# Altium PCB Ethernet_Module.PcbDoc (part 1 of 2)
Units mm, origin at the board's own origin, x right, y up, seen from the top; angles counter-clockwise.
Board outline 42 x 21.99 mm, 4 copper layers (Top Layer, Int1 (GND), Int2 (PWR), Bottom Layer), stack 0.77 mm thick; 39 components, 59 nets, 215 pads, 61 vias.
Unrouted connection lines stored in the file: 3.
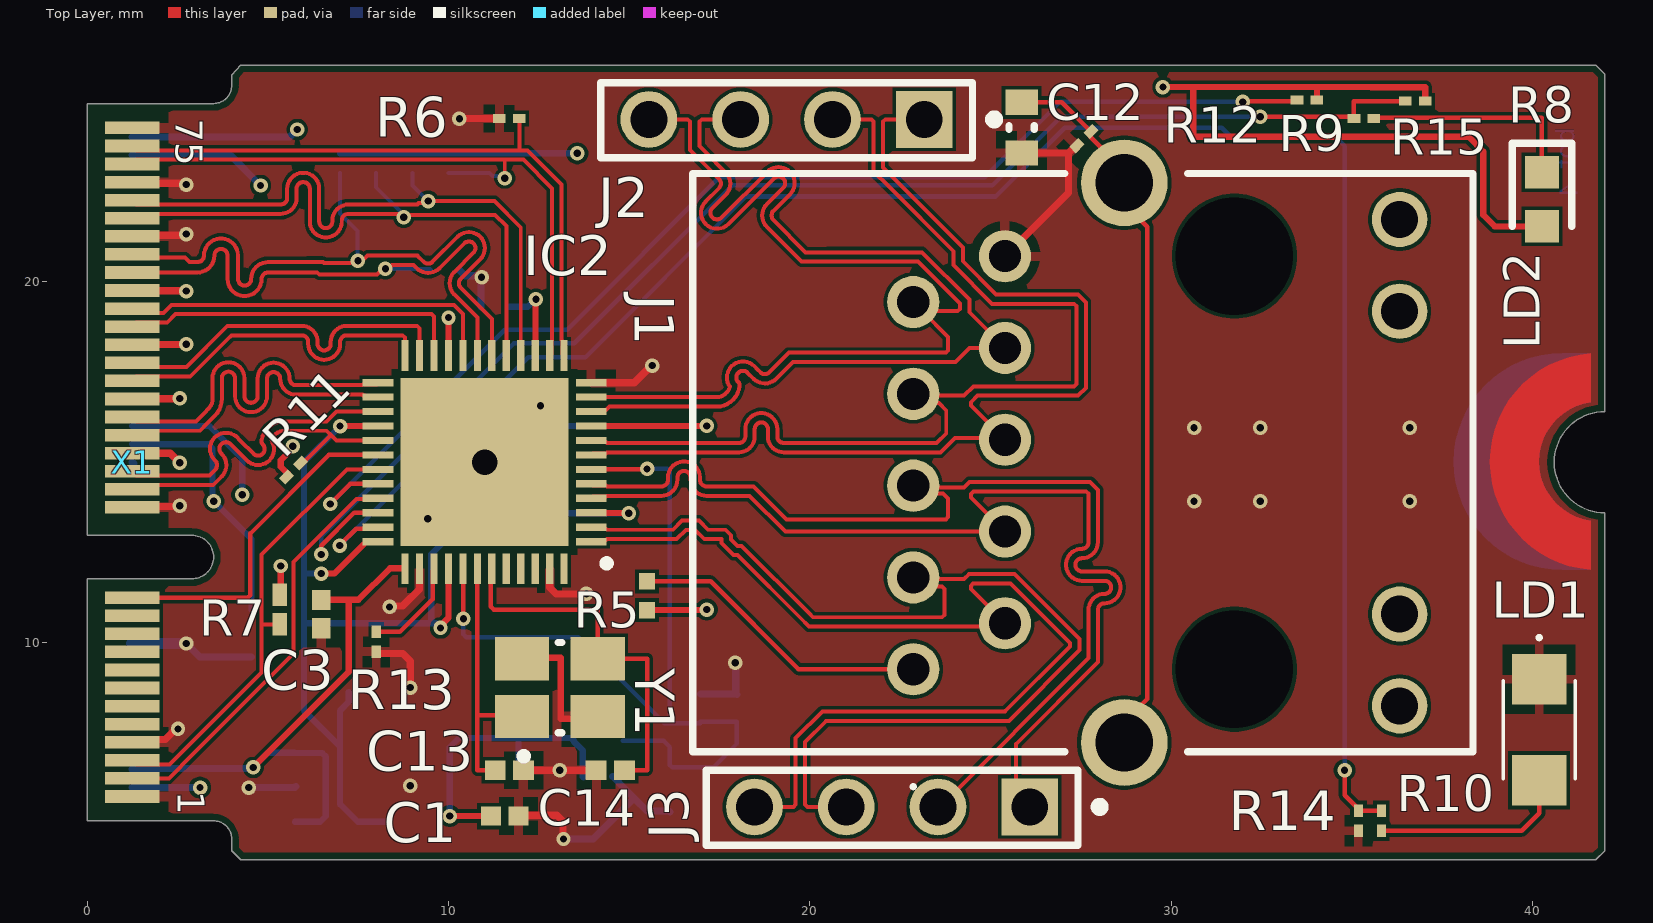
[diagram p0: Top Layer view]
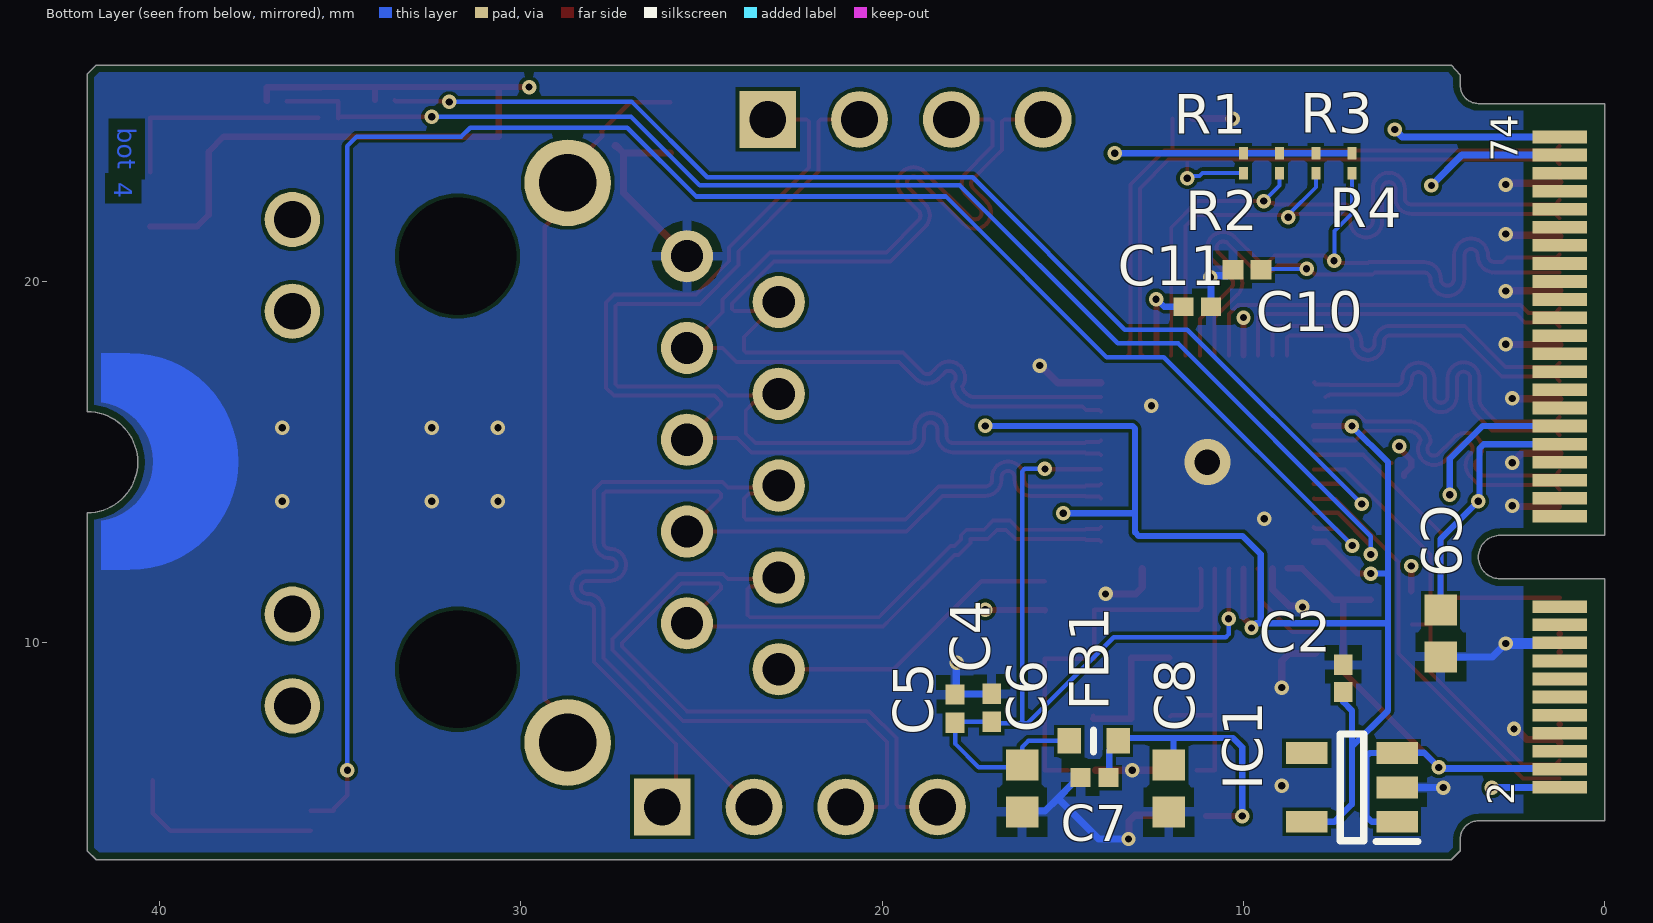
[diagram p1: Bottom Layer view, seen from below]
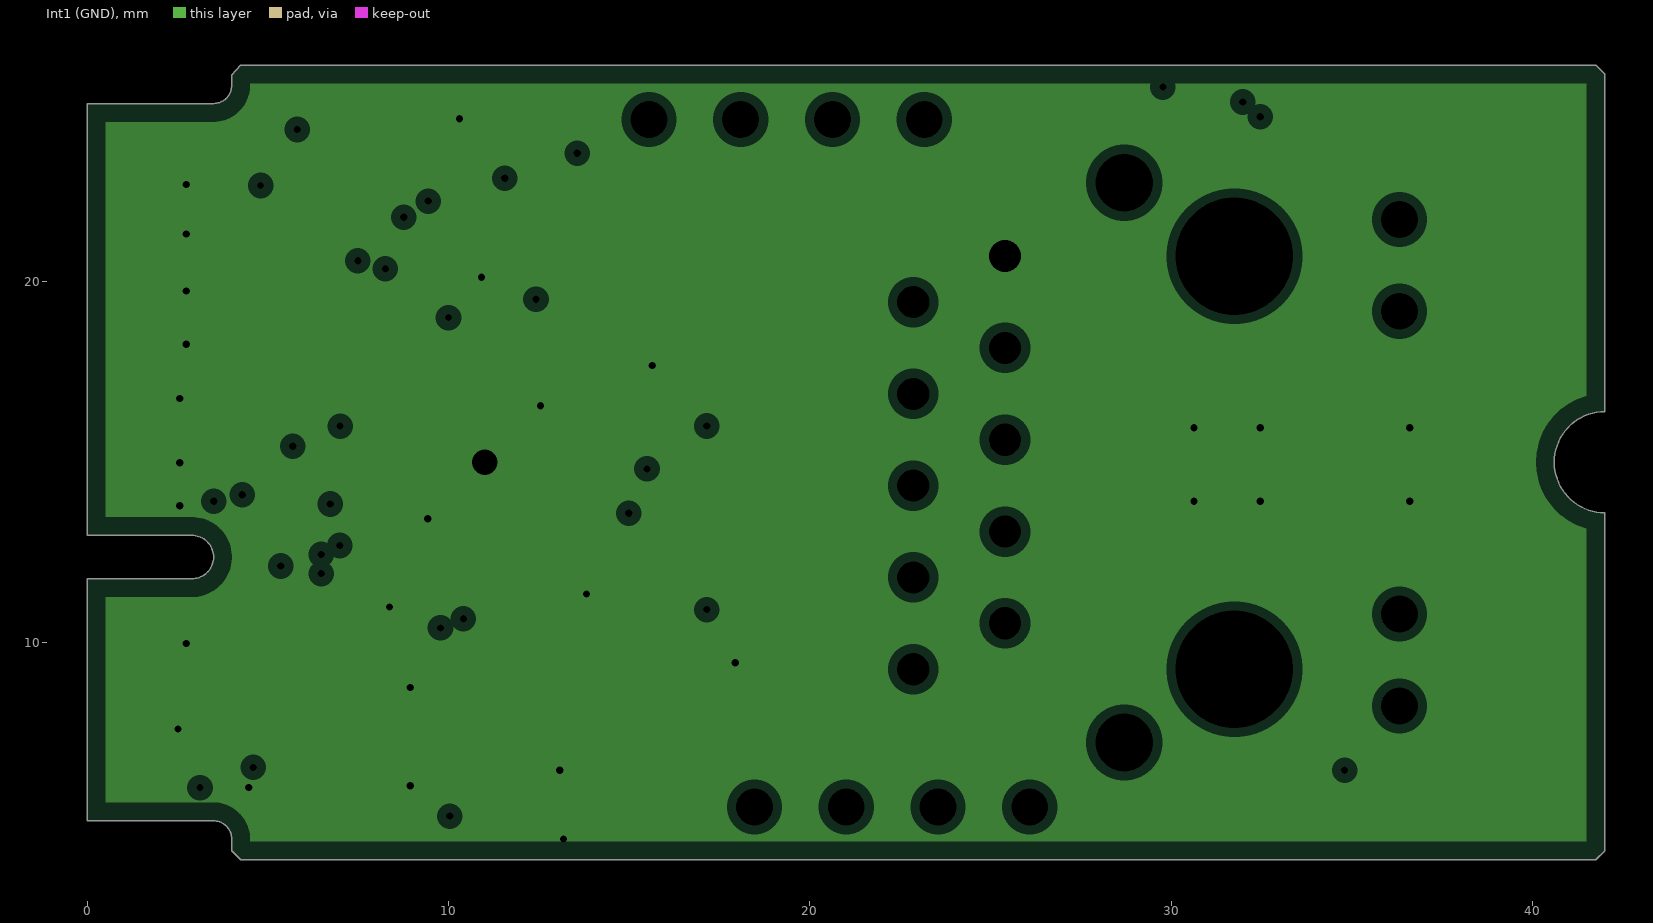
[diagram p2: Int1 (GND), clearances drawn from the general rule]
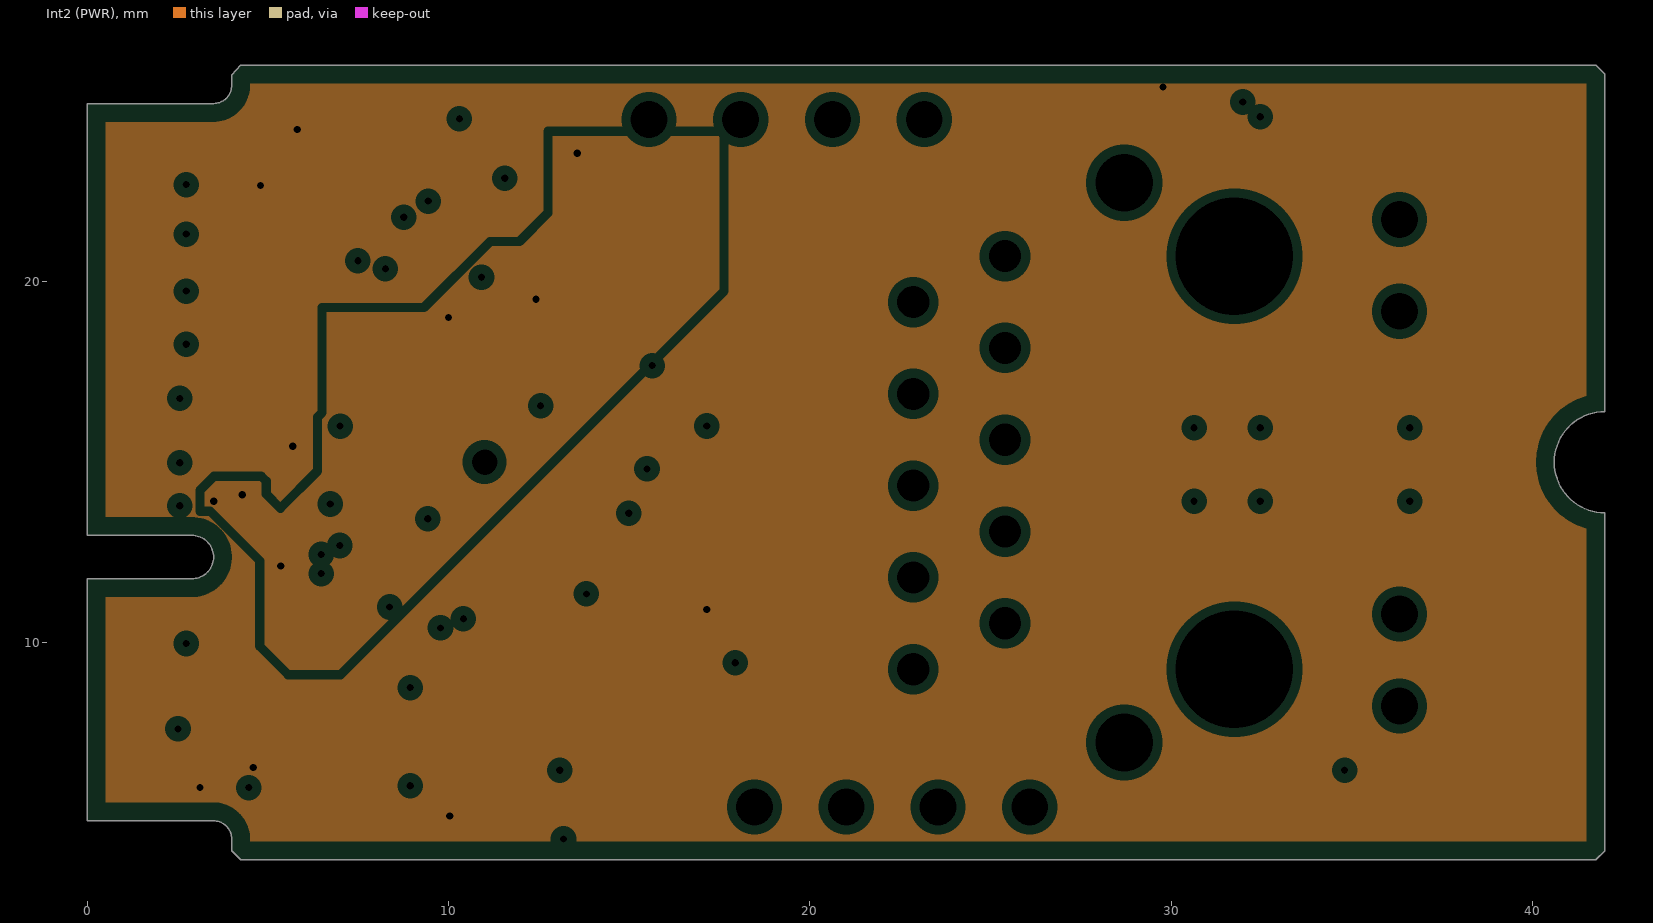
[diagram p3: Int2 (PWR), clearances drawn from the general rule]

## Layer stack, top to bottom
Top Solder: solder mask 0.0254, SM-001, Dk 4
Top Layer: signal copper 0.035
Dielectric 1: prepreg 0.1118, PP-015, Dk 4.3
Int1 (GND): plane copper 0.035, net GND
Dielectric 3: core 0.4064, Core-034, Dk 4.6
Int2 (PWR): plane copper 0.035, net (Multiple Nets)
Dielectric 5: prepreg 0.1118, PP-015, Dk 4.3
Bottom Layer: signal copper 0.035
Bottom Solder: solder mask 0.0254, SM-001, Dk 4

## Board outline
4,4.25 4,4.575 ccw(c3.5,4.575) 3.5,5.075 0,5.075 0,11.775 2.9,11.775 ccw(c2.9,12.375) 3.5,12.375 ccw(c2.9,12.375) 2.9,12.975 0,12.975 0,24.925 3.5,24.925 ccw(c3.5,25.425) 4,25.425 4,25.713 4.25,25.988 41.75,25.988 42,25.738 42,16.4 ccw(c42,15) 40.6,15 ccw(c42,15) 42,13.6 42,4.25 41.75,4 4.25,4

## Design rules (kind name [scope] priority, off if disabled: settings)
BoardOutlineClearance [All] p1: gap=0.2 ignorepadtopadclearanceinfootprint=FALSE
Clearance [All] p1: gap=0.1 ignorepadtopadclearanceinfootprint=FALSE
DiffPairsRouting DiffPair_DP_100RDiffPairsRouting [InDifferentialPairClass('DP_100R')] p1: maxlimit=0.15 minlimit=0.15 mostfreqgap=0.15 toplayer_minwidth=0.11 toplayer_maxwidth=0.11 toplayer_prefwidth=0.11 bottomlayer_minwidth=0.11 bottomlayer_maxwidth=0.11 bottomlayer_prefwidth=0.11 impedanceprofiledriven=TRUE impedanceprofileid={D0ED966C-66EA-42B8-8657-787F2A77329B} impedanceprofilevalue=100.000000 maxuncoupledlength=12.7
DiffPairsRouting DiffPair_DP_100RDiffPairsRouting_1 [InDifferentialPairClass('DP_100R')] p2: maxlimit=0.254 minlimit=0.254 mostfreqgap=0.254 toplayer_minwidth=0.381 toplayer_maxwidth=0.381 toplayer_prefwidth=0.381 bottomlayer_minwidth=0.381 bottomlayer_maxwidth=0.381 bottomlayer_prefwidth=0.381 maxuncoupledlength=12.7
DiffPairsRouting DiffPairsRouting_100R [InDifferentialPairClass('DP_100R')] p3: maxlimit=0.15 minlimit=0.15 mostfreqgap=0.15 toplayer_minwidth=0.11 toplayer_maxwidth=0.11 toplayer_prefwidth=0.11 bottomlayer_minwidth=0.11 bottomlayer_maxwidth=0.11 bottomlayer_prefwidth=0.11 impedanceprofiledriven=TRUE impedanceprofileid={D0ED966C-66EA-42B8-8657-787F2A77329B} impedanceprofilevalue=100.000000 maxuncoupledlength=12.7
DiffPairsRouting [All] p4: maxlimit=0.254 minlimit=0.254 mostfreqgap=0.254 toplayer_minwidth=0.381 toplayer_maxwidth=0.381 toplayer_prefwidth=0.381 bottomlayer_minwidth=0.381 bottomlayer_maxwidth=0.381 bottomlayer_prefwidth=0.381 maxuncoupledlength=12.7
HoleSize [All] p1: absolutevalues=TRUE maxlimit=3.25 minlimit=0.025 maxpercent=80.000 minpercent=20.000
MatchedLengths DiffPair_DP_100RMatchedLengths [InDifferentialPairClass('DP_100R')] p1: tolerance=25.4 checknetsindiffpair=FALSE checkdiffpairvsdiffpair=TRUE checkxsignals=TRUE checkothers=TRUE
MatchedLengths DiffPair_DP_100RMatchedLengths_1 [InDifferentialPairClass('DP_100R')] p2: tolerance=25.4 checknetsindiffpair=FALSE checkdiffpairvsdiffpair=TRUE checkxsignals=TRUE checkothers=TRUE
MatchedLengths MatchedLengths_1 [InNetClass('S_GP2')] p3: tolerance=1 checknetsindiffpair=TRUE checkdiffpairvsdiffpair=FALSE checkxsignals=FALSE checkothers=FALSE
MatchedLengths [InNetClass('S_GP')] p4: tolerance=1 checknetsindiffpair=TRUE checkdiffpairvsdiffpair=FALSE checkxsignals=FALSE checkothers=FALSE
PlaneClearance [All] p1: clearance=0.254
PlaneConnect [All] p1: pad.planeconnectstyle=Relief pad.reliefexpansion=0.508 pad.reliefentries=4 pad.reliefconductorwidth=0.254 pad.reliefairgap=0.254 via.planeconnectstyle=Direct via.reliefexpansion=0.508 via.reliefentries=4 via.reliefconductorwidth=0.254 via.reliefairgap=0.254
PolygonConnect [All] p1: thpad.connectstyle=Relief thpad.reliefconductorwidth=0.254 thpad.reliefentries=4 thpad.polygonreliefangle="90 Angle" thpad.airgapwidth=0.254 smdpad.connectstyle=Relief smdpad.reliefconductorwidth=0.254 smdpad.reliefentries=4 smdpad.polygonreliefangle="90 Angle" smdpad.airgapwidth=0.254 via.connectstyle=Direct via.reliefconductorwidth=0.254 via.reliefentries=4 via.polygonreliefangle="90 Angle" via.airgapwidth=0.254
RoutingVias [All] p1: holewidth=0.2 width=0.4 viastyle="Through Hole" minholewidth=0.2 minwidth=0.4 maxholewidth=3 maxwidth=6
SolderMaskExpansion [All] p1: expansion=0.102 istentingtop=FALSE
Width Width_50R [InNetClass('SE_50R')] p1: maxlimit=0.172 minlimit=0.172 preferedwidth=0.172 impedanceprofiledriven=TRUE impedanceprofileid={CEA07893-88F1-4413-85C8-7467995CDE0A} impedanceprofilevalue=50.000000 minimp=50.000000 maximp=50.000000 favimp=50.000000
Width [All] p2: maxlimit=4 minlimit=0.1 preferedwidth=0.125
26 further rules are at their usual default settings.

## Classes and differential pairs
differential pair class DP_100R: FMC_GP_D0 FMC_GP_D1 FMC_GP_D2 FMC_GP_D3 FMC_GP_D4 FMC_GP_D5 FMC_GP_D6 FMC_GP_D7 MDI_0 MDI_1 MDI_2 MDI_3
net class SE_50R: FMC_GP_S0 FMC_GP_S1 FMC_GP_S2 FMC_GP_S3 FMC_GP_S4 FMC_GP_S5 FMC_GP_S6
net class S_GP: FMC_GP_S0 FMC_GP_S1 FMC_GP_S2 FMC_GP_S3 FMC_GP_S4 FMC_GP_S5 FMC_GP_S6
net class FMC_GP_S[0..7]: FMC_GP_S0 FMC_GP_S1 FMC_GP_S2 FMC_GP_S3 FMC_GP_S4 FMC_GP_S5 FMC_GP_S6 FMC_GP_S7
net class FMC_GP_D_P[0..7]: FMC_GP_D_P0 FMC_GP_D_P1 FMC_GP_D_P2 FMC_GP_D_P3 FMC_GP_D_P4 FMC_GP_D_P5 FMC_GP_D_P6 FMC_GP_D_P7
net class FMC_GP_D_N[0..7]: FMC_GP_D_N0 FMC_GP_D_N1 FMC_GP_D_N2 FMC_GP_D_N3 FMC_GP_D_N4 FMC_GP_D_N5 FMC_GP_D_N6 FMC_GP_D_N7
net class DP_GP: FMC_GP_D_N0 FMC_GP_D_N1 FMC_GP_D_N2 FMC_GP_D_N3 FMC_GP_D_N4 FMC_GP_D_N5 FMC_GP_D_N6 FMC_GP_D_N7 FMC_GP_D_P0 FMC_GP_D_P1 FMC_GP_D_P2 FMC_GP_D_P3 FMC_GP_D_P4 FMC_GP_D_P5 FMC_GP_D_P6 FMC_GP_D_P7 MDI_0_N MDI_0_P MDI_1_N MDI_1_P MDI_2_N MDI_2_P MDI_3_N MDI_3_P
component class connector: X1
differential pair MDI_3: +MDI_3_P -MDI_3_N
differential pair MDI_2: +MDI_2_P -MDI_2_N
differential pair MDI_1: +MDI_1_P -MDI_1_N
differential pair MDI_0: +MDI_0_P -MDI_0_N
differential pair FMC_GP_D0: +FMC_GP_D_P0 -FMC_GP_D_N0
differential pair FMC_GP_D7: +FMC_GP_D_P7 -FMC_GP_D_N7
differential pair FMC_GP_D6: +FMC_GP_D_P6 -FMC_GP_D_N6
differential pair FMC_GP_D5: +FMC_GP_D_P5 -FMC_GP_D_N5
differential pair FMC_GP_D4: +FMC_GP_D_P4 -FMC_GP_D_N4
differential pair FMC_GP_D3: +FMC_GP_D_P3 -FMC_GP_D_N3
differential pair FMC_GP_D2: +FMC_GP_D_P2 -FMC_GP_D_N2
differential pair FMC_GP_D1: +FMC_GP_D_P1 -FMC_GP_D_N1

## Components (designator, comment, footprint, x,y, rotation, side; value= is the part's Value field where it differs from the comment)
C1 "1uF" CAPC1005X60X30LL05T10 11.557,5.207 r180 top
C2 "1uF" CAPC1005X60X30LL05T10 7.239,9.017 r270 bottom
C3 "100nF" CAPC1050X55X23LL05T13 6.477,10.795 r90 top
C4 "100nF" CAPC1050X55X23LL05T13 16.967,8.204 r270 bottom
C5 "100nF" CAPC1050X55X23LL05T13 17.983,8.179 r270 bottom
C6 "10uF" CAPC1608X90X35LL15T15 16.129,5.969 r90 bottom
C7 "100nF" CAPC1050X55X23LL05T13 14.122,6.274 r180 bottom
C8 "10uF" CAPC1608X90X35LL15T15 12.065,5.969 r90 bottom
C9 "10uF" CAPC1608X90X35LL15T15 4.547,10.262 r90 bottom
C10 "1uF" CAPC1005X60X30LL05T10 11.278,19.304 r0 bottom
C11 "27pF" CAPC1005X56X25LL10T15 9.906,20.32 r180 bottom
C12 "1nF" CAPC0603(1608)100_L 25.857,24.257 r90 top
C13 "27pF" CAPC1005X56X25LL10T15 11.684,6.477 r180 top
C14 "27pF" CAPC1005X56X25LL10T15 14.478,6.477 r0 top
FB1 "BLM18KG601SN1B" BLM18EG121SH1D 14.148,7.29 r0 bottom
IC1 "LD39015M10R" SOT95P280X145-5N 7,6 r0 bottom
IC2 "RTL8211E-VL-CG" QFN40P600X600X100-49N 11,15 r180 top
J1 "HFJV1-E1G16-L12RL" HFJV1E1G16L12RL 22.86,9.271 r90 top
J2 "HTSW-104-07-G-S" FP-HTSW-104-07-G-S-MFG 19.355,24.486 r180 top
J3 "HTSW-104-07-G-S" FP-HTSW-104-07-G-S-MFG 22.276,5.461 r180 top
LD1 "AA3021LSYSK_J3-TR" AA3021LSYSKJ3TR 40.183,7.595 r270 top
LD2 "CSL1901VW1" LEDC1608X65N 40.259,22.276 r270 top
R1 "4.7kR" RESC0603X28X15LL05T05 10,23.275 r90 bottom
R2 "4.7kR" RESC0603X28X15LL05T05 9,23.275 r90 bottom
R3 "4.7kR" RESC0603X28X15LL05T05 8,23.275 r90 bottom
R4 "4.7kR" RESC0603X28X15LL05T05 7,23.275 r90 bottom
R5 "0R" RESC1005X40X25LL05T05 15.494,11.303 r270 top
R6 "4.7kR" RESC0603X28X15LL05T05 11.684,24.511 r0 top
R7 "1.5kR" RESC0603X28N 5.334,10.922 r270 top
R8 "4.7kR" RESC0603X28X15LL05T05 36.754,24.994 r0 top
R9 "4.7kR" RESC0603X28X15LL05T05 33.757,25.019 r0 top
R10 "75R" RESC0603X28X15LL05T05 35.814,5.08 r270 top
R11 "4.7kR" RESC0603X28X15LL05T05 5.715,14.783 r225 top
R12 "1MegR" RESC0603X28X15LL05T05 27.584,23.952 r45 top
R13 "2.49kR" RESC0603X28X15LL05T05 8.001,10.033 r90 top
R14 "4.7kR" RESC0603X28X15LL05T05 35.179,5.08 r90 top
R15 "750R" RESC0603X28X15LL05T05 35.331,24.511 r180 top
X1 "CONN PWR CARD EDGE PCB SLOT MALE" CON-67_0.5MM_PCB_SLOT 1.25,15 r270 top
Y1 "FL2500213Z" FL2500213Z 13.081,8.763 r0 top

## Footprints (in the part's own frame and the unit in brackets; to place one, negate y for a bottom-side part, rotate by r counter-clockwise, add the part's x,y. Pads: shape width x height; smd on the part's side, far side on the other; paste and mask are expansions set on the pad)
AA3021LSYSKJ3TR [mm]
  rect 1.4x1.5 smd: 1(-1.4,0) 2(1.4,0)
  silkscreen extent -2.6,-1 1.35,1, body extent -1.35,-1 1.35,1, height 1.4
BLM18EG121SH1D [mm]
  rect 0.65x0.7 smd: 1(-0.675,0) 2(0.675,0)
  silkscreen extent 0,-0.3 0,0.3, body extent -0.8,-0.4 0.8,0.4, height 0.8
CAPC0603(1608)100_L [mm] "Chip Capacitor, Body 1.6x0.8mm, Height 1.0mm, IPC High Density"
  rect 0.7x0.9 smd: 1(-0.7,0) 2(0.7,0)
  silkscreen extent -0.05,-0.35 0.05,0.35, body extent -0.87,-0.47 0.88,0.48, height 1
CAPC1005X56X25LL10T15 [mm] "Chip Capacitor, 2-Leads, Body 1.00x0.50mm, IPC High Density"
  rect 0.58x0.54 smd: 1(-0.39,0) 2(0.39,0)
  body extent -0.55,-0.3 0.55,0.3, height 0.56
CAPC1005X60X30LL05T10 [mm] "Chip Capacitor, 2-Leads, Body 1.00x0.50mm, IPC High Density"
  rect 0.56x0.52 smd: 1(-0.38,0) 2(0.38,0)
  body extent -0.53,-0.28 0.53,0.28, height 0.6
CAPC1050X55X23LL05T13 [mm] "Chip Capacitor, 2-Leads, Body 1.05x0.55mm, IPC High Density"
  rect 0.56x0.52 smd: 1(-0.39,0) 2(0.39,0)
  body extent -0.53,-0.28 0.53,0.28, height 0.55
CAPC1608X90X35LL15T15 [mm] "Chip Capacitor, 2-Leads, Body 1.60x0.81mm, IPC High Density"
  rect 0.85x0.9 smd: 1(-0.65,0) 2(0.65,0)
  body extent -0.88,-0.48 0.87,0.48, height 0.9
CON-67_0.5MM_PCB_SLOT [mm] "Connector 67, 0.5mm pitch - No BOM"
  rect 0.35x1.5 smd: 1(9.25,0) 3(8.75,0) 5(8.25,0) 7(7.75,0) 9(7.25,0) 11(6.75,0) 13(6.25,0) 15(5.75,0) 17(5.25,0) 19(4.75,0) 21(4.25,0) 23(3.75,0) 33(1.25,0) 35(0.75,0) 37(0.25,0) 39(-0.25,0) 41(-0.75,0) 43(-1.25,0) 45(-1.75,0) 47(-2.25,0) 49(-2.75,0) 51(-3.25,0) 53(-3.75,0) 55(-4.25,0) 57(-4.75,0) 59(-5.25,0) 61(-5.75,0) 63(-6.25,0) 65(-6.75,0) 67(-7.25,0) 69(-7.75,0) 71(-8.25,0) 73(-8.75,0) 75(-9.25,0)
  rect 0.35x1.5 smd far side: 2(9,0) 4(8.5,0) 6(8,0) 8(7.5,0) 10(7,0) 12(6.5,0) 14(6,0) 16(5.5,0) 18(5,0) 20(4.5,0) 22(4,0) 32(1.5,0) 34(1,0) 36(0.5,0) 38(0,0) 40(-0.5,0) 42(-1,0) 44(-1.5,0) 46(-2,0) 48(-2.5,0) 50(-3,0) 52(-3.5,0) 54(-4,0) 56(-4.5,0) 58(-5,0) 60(-5.5,0) 62(-6,0) 64(-6.5,0) 66(-7,0) 68(-7.5,0) 70(-8,0) 72(-8.5,0) 74(-9,0)
FL2500213Z [mm]
  rect 1.5x1.2 smd: 1(-1.05,-0.8) 2(1.05,-0.8) 3(1.05,0.8) 4(-1.05,0.8)
  silkscreen extent -1.1,-2 0.05,1.25, body extent -1.68,-1.28 1.68,1.28, height 0.88
FP-HTSW-104-07-G-S-MFG [mm]
  rect 1.57x1.57 hole 1.02 paste-1000 mask+0: 1(-3.81,0)
  round 1.57 hole 1.02 paste-1000 mask+0: 2(-1.27,0) 3(1.27,0) 4(3.81,0)
  silkscreen extent -5.87,-1.02 5.14,1.06, body extent -5.24,-1.37 5.24,1.37, height 0.25
HFJV1E1G16L12RL [mm]
  round 2.4 hole 1.6: MH1(-2.03,-5.84) MH2(13.46,-5.84)
  round 1.625 hole 3.25 unplated: MH3(0,-8.89) MH4(11.43,-8.89)
  round 1.446 hole 0.89: P1(0,0) P2(1.27,-2.54) P3(2.54,0) P4(3.81,-2.54) P5(5.08,0) P6(6.35,-2.54) P7(7.62,0) P8(8.89,-2.54) P9(10.16,0) P10(11.43,-2.54)
  round 1.53 hole 1.02: P11(-1.015,-13.46) P12(1.525,-13.46) P13(9.905,-13.46) P14(12.445,-13.46)
  silkscreen extent -3.3,-15.49 13.71,6.1, body extent -2.73,-15.49 14.16,6.1, height 16.61
LEDC1608X65N [mm]
  rect 0.9x0.95 smd: 1(-0.75,0) 2(0.75,0)
  silkscreen extent -1.55,-0.82 0.75,0.82, body extent -0.8,-0.4 0.8,0.4, height 0.55
QFN40P600X600X100-49N [mm]
  rect 0.85x0.2 smd: 1(-2.95,2.2) 2(-2.95,1.8) 3(-2.95,1.4) 4(-2.95,1) 5(-2.95,0.6) 6(-2.95,0.2) 7(-2.95,-0.2) 8(-2.95,-0.6) 9(-2.95,-1) 10(-2.95,-1.4) 11(-2.95,-1.8) 12(-2.95,-2.2) 25(2.95,-2.2) 26(2.95,-1.8) 27(2.95,-1.4) 28(2.95,-1) 29(2.95,-0.6) 30(2.95,-0.2) 31(2.95,0.2) 32(2.95,0.6) 33(2.95,1) 34(2.95,1.4) 35(2.95,1.8) 36(2.95,2.2)
  rect 0.2x0.85 smd: 13(-2.2,-2.95) 14(-1.8,-2.95) 15(-1.4,-2.95) 16(-1,-2.95) 17(-0.6,-2.95) 18(-0.2,-2.95) 19(0.2,-2.95) 20(0.6,-2.95) 21(1,-2.95) 22(1.4,-2.95) 23(1.8,-2.95) 24(2.2,-2.95) 37(2.2,2.95) 38(1.8,2.95) 39(1.4,2.95) 40(1,2.95) 41(0.6,2.95) 42(0.2,2.95) 43(-0.2,2.95) 44(-0.6,2.95) 45(-1,2.95) 46(-1.4,2.95) 47(-1.8,2.95) 48(-2.2,2.95)
  rect 4.65x4.65 smd: 49(0,0)
  silkscreen extent -3.47,2.7 -3.28,2.9, body extent -3.05,-3.05 3.05,3.05, height 1
RESC0603X28N [mm]
  rect 0.625x0.4 smd: 1(-0.412,0) 2(0.412,0)
  body extent -0.3,-0.15 0.3,0.15, height 0.28
RESC0603X28X15LL05T05 [mm] "Chip Resistor, 2-Leads, Body 0.60x0.30mm, IPC High Density"
  rect 0.35x0.25 smd: 1(-0.275,0) 2(0.275,0)
  body extent -0.33,-0.17 0.32,0.18, height 0.28
RESC1005X40X25LL05T05 [mm] "Chip Resistor, 2-Leads, Body 1.05x0.55mm, IPC High Density"
  rect 0.45x0.45 smd: 1(-0.4,0) 2(0.4,0)
  body extent -0.53,-0.28 0.53,0.28, height 0.4
SOT95P280X145-5N [mm]
  rect 1.15x0.6 smd: 1(-1.25,0.95) 2(-1.25,0) 3(-1.25,-0.95) 4(1.25,-0.95) 5(1.25,0.95)
  silkscreen extent -1.83,-1.48 0.33,1.5, body extent -1.4,-1.48 1.4,1.48, height 1.45

## Part data
C1 C2 C10: library part CMP-2008-02044-1, Case Code (Imperial)=0402, Dielectric=X5R, Dielectric Material=Ceramic, Manufacturer=Kemet, Manufacturer Part Number=C0402C105K9PACTU, Max Operating Temperature=85°C, Min Operating Temperature=-55°C, Package Quantity=1, Supplier Part Number 1=399-4873-6-ND, Tolerance=10%, Voltage=6.3V, Case/Package=0402, Category="Ceramic Capacitors", ComponentLink1Description=https://datasheet.ciiva.com/28645/1789732-28645392.pdf?src-supplier=Element14, ComponentLink1URL=https://datasheet.ciiva.com/28645/1789732-28645392.pdf?src-supplier=Element14, ComponentLink2Description=https://datasheet.ciiva.com/11786/0900766b8116eb59-11786028.pdf?src-supplier=RSComponents, ComponentLink2URL=https://datasheet.ciiva.com/11786/0900766b8116eb59-11786028.pdf?src-supplier=RSComponents, ComponentLink3Description=https://datasheet.ciiva.com/7747/kem-c1006-x5r-smd-7747445.pdf?src-supplier=Element14, ComponentLink3URL=https://datasheet.ciiva.com/7747/kem-c1006-x5r-smd-7747445.pdf?src-supplier=Element14, ComponentLink4Description=https://datasheet.ciiva.com/7747/40889-7747623.pdf?src-supplier=Element14, ComponentLink4URL=https://datasheet.ciiva.com/7747/40889-7747623.pdf?src-supplier=Element14, ComponentLink5Description=https://datasheet.ciiva.com/18192/getdatasheetpartid-127800-18192427.pdf?src-supplier=Verical, ComponentLink5URL=https://datasheet.ciiva.com/18192/getdatasheetpartid-127800-18192427.pdf?src-supplier=Verical, Depth=0.5mm, Height=0.5mm, Lead Free="Lead Free", Lead Pitch=0.3mm, Length=1mm, Mount="Surface Mount", Number of Pins=2, Packaging="Tape and Reel", Part Number=C0402C105K9PACTU, Pricing 1="1=0.10000, 10=0.02600, 100=0.01180, 500=0.00844, 1000=0.00662, 2500=0.00602, 5000=0.00554 (USD)", Radiation Hardening=No, REACH SVHC="No SVHC", RoHS=Yes, Stock 1=1737568, Supplier 1=Digi-Key, Termination=SMD/SMT, Thickness=0.022inch, Voltage Rating=6.3V, Voltage Rating (DC)=6.3V, Width=0.02inch
C3 C4 C5 C7: library part CMP-2000-05439-1, "Chip Capacitor, 100 nF, +/- 10%, 16 V, -55 to 125 degC, 0402 (1005 Metric), RoHS, Tape and Reel", Case Code (Imperial)=0402, Case Code (Metric)=1005, Dielectric=X7R, Manufacturer="Samsung Electro-Mechanics", Manufacturer Part Number=CL05B104KO5NNNC, Max Operating Temperature=125°C, Min Operating Temperature=-55°C, Package Quantity=1, Rated Voltage=16V, Supplier Part Number 1=1276-1001-1-ND, Tolerance=10%, Tolerance (%)=±10%, Case Size/Dimension=0402, Case/Package=0402, Category="Ceramic Capacitors", ComponentLink1Description=https://datasheet.ciiva.com/26920/getdatasheetpartid-359683-26920169.pdf?src-supplier=Verical, ComponentLink1URL=https://datasheet.ciiva.com/26920/getdatasheetpartid-359683-26920169.pdf?src-supplier=Verical, ComponentLink2Description=https://datasheet.ciiva.com/29198/458718-da-01-en-vs-kondensator-0402-29198423.pdf?src-supplier=Conrad, ComponentLink2URL=https://datasheet.ciiva.com/29198/458718-da-01-en-vs-kondensator-0402-29198423.pdf?src-supplier=Conrad, ComponentLink3Description=https://datasheet.ciiva.com/16208/cl05b104kq5nnnc-16208343.pdf?src-supplier=Future+Electronics, ComponentLink3URL=https://datasheet.ciiva.com/16208/cl05b104kq5nnnc-16208343.pdf?src-supplier=Future+Electronics, ComponentLink4Description=https://datasheet.ciiva.com/26309/mlcc-catalogdownload2013-eng-26309003.pdf?src-supplier=Distrelec, ComponentLink4URL=https://datasheet.ciiva.com/26309/mlcc-catalogdownload2013-eng-26309003.pdf?src-supplier=Distrelec, Contact Plating=Tin, Datasheet URL=https://datasheet.ciiva.com/29198/458718-da-01-en-vs-kondensator-0402-29198423.pdf, Datasheet Version=Nov-10, Depth=0.5mm, Height=0.5mm, Lead Free="Lead Free", Length=1mm, Manufacturer URL=http://www.samsungsem.com/global/index.jsp, Material=Ceramic, Mount="Surface Mount", Packaging="Tape and Reel", Pricing 1="1=0.10000, 10=0.02800, 50=0.01520, 100=0.01240, 500=0.00886, 1000=0.00696, 2500=0.00632, 5000=0.00582 (USD)", Radiation Hardening=No, RoHS=Yes, Stock 1=18886859, Supplier 1=Digi-Key, Thickness=0.022inch, Voltage=16V, Voltage Rating=16V, Voltage Rating (DC)=16V, Width=0.02inch
C6 C8 C9: library part CMP-2006-04476-1, Case Code (Imperial)=0603, Case Code (Metric)=1608, Dielectric=X5R, Dielectric Material=Ceramic, Manufacturer="AVX Interconnect / Elco", Manufacturer Part Number=06036D106MAT2A, Max Operating Temperature=85°C, Min Operating Temperature=-55°C, Package Quantity=1, Supplier Part Number 1=478-5318-1-ND, Tolerance=20%, Voltage=6.3V, Case/Package=0603, Category="Ceramic Capacitors", ComponentLink1Description=https://datasheet.ciiva.com/153/cx5r-153301.pdf?src-supplier=Digi-Key, ComponentLink1URL=https://datasheet.ciiva.com/153/cx5r-153301.pdf?src-supplier=Digi-Key, ComponentLink2Description=https://datasheet.ciiva.com/1458/1796776-1458117.pdf?src-supplier=Element14, ComponentLink2URL=https://datasheet.ciiva.com/1458/1796776-1458117.pdf?src-supplier=Element14, ComponentLink3Description=https://datasheet.ciiva.com/153/cx5r-153302.pdf?src-supplier=Digi-Key, ComponentLink3URL=https://datasheet.ciiva.com/153/cx5r-153302.pdf?src-supplier=Digi-Key, ComponentLink4Description=https://datasheet.ciiva.com/153/cx5r-153303.pdf?src-supplier=Digi-Key, ComponentLink4URL=https://datasheet.ciiva.com/153/cx5r-153303.pdf?src-supplier=Digi-Key, ComponentLink5Description=https://datasheet.ciiva.com/5422/cx5r-33896-5422935.pdf?src-supplier=Mouser, ComponentLink5URL=https://datasheet.ciiva.com/5422/cx5r-33896-5422935.pdf?src-supplier=Mouser, ComponentLink6Description=https://datasheet.ciiva.com/16538/cx5r-16538025.pdf?src-supplier=Avnet+Asia, ComponentLink6URL=https://datasheet.ciiva.com/16538/cx5r-16538025.pdf?src-supplier=Avnet+Asia, ComponentLink7Description=https://datasheet.ciiva.com/2987/cx5r-2987866.pdf?src-supplier=Avnet, ComponentLink7URL=https://datasheet.ciiva.com/2987/cx5r-2987866.pdf?src-supplier=Avnet, ComponentLink8Description=https://datasheet.ciiva.com/14591/70001028-14591754.pdf?src-supplier=Allied+Electronics, ComponentLink8URL=https://datasheet.ciiva.com/14591/70001028-14591754.pdf?src-supplier=Allied+Electronics, ComponentLink9Description=https://datasheet.ciiva.com/2987/cx5r-2987867.pdf?src-supplier=Avnet, ComponentLink9URL=https://datasheet.ciiva.com/2987/cx5r-2987867.pdf?src-supplier=Avnet, ComponentLink10Description=https://datasheet.ciiva.com/16201/cx5r-16201627.pdf?src-supplier=Future+Electronics, ComponentLink10URL=https://datasheet.ciiva.com/16201/cx5r-16201627.pdf?src-supplier=Future+Electronics, Construction=Flat, Contact Plating=Tin,Matte, Depth=0.81mm, Height=0.9mm, Lead Free="Lead Free", Length=1.6mm, Mount="Surface Mount,PCB", Number of Pins=2, Packaging="Tape and Reel", Part Number=06036D106MAT2A, Pricing 1="1=0.24000, 10=0.16500, 50=0.09900, 100=0.08360, 500=0.05720, 1000=0.05060 (USD)", Radiation Hardening=No, REACH SVHC="No SVHC", RoHS=Yes, RoHS Compliant=Yes, Series=-, Stock 1=1934840, Supplier 1=Digi-Key, Termination=SMD/SMT, Thickness=0.035inch, Voltage Rating=6.3V, Voltage Rating (DC)=6.3V, Width=0.032inch
C11 C13 C14: library part CMP-2008-02772-1, "0402YA270JAT2A", Manufacturer="AVX Interconnect / Elco", Part Number=0402YA270JAT2A
C12: library part CMP-1035-01871-1, "CAP 1nF 10V ±1% 0603 (1608 Metric) Thickness 1mm SMD", Case-EIA=0603, Case-Metric=1608, Rated Voltage="10 V", Tolerance=Â±1%, Max Thickness="1 mm", Technology=SMT
FB1: "Ferrite Bead", Manufacturer_Name="Murata Electronics", Datasheet Link=http://www.murata.com/~/media/webrenewal/support/library/catalog/products/emc/emifil/c31e.ashx?la=en-gb, Height=0.95mm, Manufacturer_Part_Number=BLM18KG601SN1B
IC1: "Integrated Circuit", Manufacturer_Name=STMicroelectronics, Mouser Part Number=511-LD39015M10R, Arrow Part Number=LD39015M10R, Arrow Price/Stock=https://www.arrow.com/en/products/ld39015m10r/stmicroelectronics, Datasheet Link=http://www.st.com/web/en/resource/technical/document/datasheet/CD00173477.pdf, Height=1.45mm, Manufacturer_Part_Number=LD39015M10R, Mouser Price/Stock=https://www.mouser.co.uk/ProductDetail/STMicroelectronics/LD39015M10R?qs=wsLAKTqgg6iLO1LS4XmvbQ%3D%3D
IC2: "GbE PHY with RGMII interface & EEE feature, 1.8V & 1.5V", Manufacturer=Realtek, Supplier Part Number=758353-RTL8211E-VL-CG, Manufacturer Part Number=RTL8211E-VL-CG, Pricing="98=3,06900 (USD)", RoHS=Yes, RoHS Compliant=Yes, Stock=54900, Supplier="Win Source Electronics"
J1: "Connector", Manufacturer_Name="Halo Electronics", Mouser Part Number=493-HFJV1-E1G16L12RL, Datasheet Link=https://componentsearchengine.com/Datasheets/1/HFJV1-E1G16-L12RL.pdf, Height=16.51mm, Manufacturer_Part_Number=HFJV1-E1G16-L12RL, Mouser Price/Stock=https://www.mouser.co.uk/ProductDetail/HALO-Electronics/HFJV1-E1G16-L12RL?qs=cGEy3R83DS%2FPhGzGdiRY4A%3D%3D
J2 J3: library part CMP-02766-001776-1, "CONN HEADER VERT 4POS 2.54MM", Contact Material=Bronze, Contact Plating=Gold, Gender=Male, Mount="Through Hole", Number of Contacts=4, Number of Rows=1, Packaging=Bulk, Pitch=2.54mm, Radiation Hardening=No, Reach SVHC Compliant=Yes, RoHS Compliant=Yes, Series=HTSW, Termination="Through Hole"
LD1: "LED", Manufacturer_Name=Kingbright, Manufacturer_Part_Number=AA3021LSYSK/J3-TR, Mouser Part Number=604-AA3021LSYSK/J3TR, Datasheet Link=https://eagle.componentsearchengine.com/Datasheets/1/AA3021LSYSK_J3-TR.pdf, Height=1.3mm, Mouser Price/Stock=https://www.mouser.co.uk/ProductDetail/Kingbright/AA3021LSYSK-J3-TR?qs=Oo40KB9lBTmS1V8p5PSO3Q%3D%3D
LD2: "LED", Manufacturer_Name="ROHM Semiconductor", Mouser Part Number=755-CSL1901VW1, Datasheet Link=https://fscdn.rohm.com/en/products/databook/datasheet/opto/led/chip_mono/csl1901vw1-e.pdf, Height=0.65mm, Manufacturer_Part_Number=CSL1901VW1, Mouser Price/Stock=https://www.mouser.co.uk/ProductDetail/ROHM-Semiconductor/CSL1901VW1?qs=vvQtp7zwQdNmrXZcE27xEA%3D%3D
R1 R2 R3 R4 R6 R8 R9 R10 R11 R14 R15: library part CMP-2004-00671-1, "CRCW02014K70FKED", Manufacturer="Vishay Dale", Part Number=CRCW02014K70FKED
R5: library part CMP-2000-07451-1, "ERJ2GE0R00X Chip Resistor, 0 Ohm, 0.1 W, -55 to 155 degC, 0402 (1005 Metric), RoHS, Tape and Reel", Case Code (Imperial)=0402, Case Code (Metric)=1005, Manufacturer=Panasonic, Max Operating Temperature=155degC, Max Power Dissipation=100mW, Min Operating Temperature=-55degC, Package Description="2-Pin Surface Mount Device, Body 1 x 0.5 mm", Package Quantity=1, Package Reference=402, Resistance=0mOhm, Temperature Coefficient=600ppm/��C, Tolerance=5%, Voltage Rating=50V, Case/Package=0402, Composition=ThickFilm, Contact Plating=Tin, Datasheet URL=https://industrial.panasonic.com/cdbs/www-data/pdf/RDA0000/AOA0000C301.pdf, Datasheet Version=03/2015, Depth=0.5mm, Height=0.35mm, Lead Free=LeadFree, Length=1mm, Manufacturer URL=http://www.panasonic.com/, Military Standard=Not, Mount=SurfaceMount, Mounting Technology=SurfaceMount, Number of Terminations=2, Packaging=TapeandReel, Power Rating=100mW, Radiation Hardening=No, REACH SVHC=NoSVHC, RoHSCompliant=True, Termination=SMD/SMT, Voltage Rating (DC)=50V, Width=0.02inch
R7: library part CRCW02011K50FKED, "CRCW02011K50FKED", Manufacturer_Name=Vishay, Mouser Part Number=71-CRCW02011K50FKED, Arrow Part Number=CRCW02011K50FKED, Arrow Price/Stock=https://www.arrow.com/en/products/crcw02011k50fked/vishay, Datasheet Link=http://www.vishay.com/docs/20035/dcrcwe3.pdf, Height=0.28mm, Manufacturer_Part_Number=CRCW02011K50FKED, Mouser Price/Stock=https://www.mouser.com/Search/Refine.aspx?Keyword=71-CRCW02011K50FKED
R12: library part CMP-2004-00671-1, "CRCW02011M00FKED", Manufacturer="Vishay Dale", Part Number=CRCW02014K70FKED
R13: library part CMP-2004-00671-1, "CRCW02012K49FKED", Manufacturer="Vishay Dale", Part Number=CRCW02014K70FKED
X1: library part CMP-01224-1, "Mates with 2199119-4 - No BOM", Card Thickness=0.8mm, Card Type="Non Specified - Dual Edge", Gender=Male, Mates with=2199119-4, Number of Positions=67, Pitch=0.5mm
Y1: "Crystal or Oscillator", Manufacturer_Name="Diodes Inc.", Mouser Part Number=729-FL2500213Z, Arrow Part Number=FL2500213Z, Arrow Price/Stock=https://www.arrow.com/en/products/fl2500213z/diodes-incorporated?region=nac, Datasheet Link=https://www.diodes.com/assets/Datasheets/FL.pdf, Height=0.78mm, Manufacturer_Part_Number=FL2500213Z, Mouser Price/Stock=https://www.mouser.co.uk/ProductDetail/Diodes-Incorporated/FL2500213Z?qs=Rp3RbKSfAt0a9%2FPmeza8Xg%3D%3D

## Via types
v1: diameter 0.4, hole 0.2, Top Layer to Bottom Layer, 60 vias
v2: diameter 1.27, hole 0.711, Top Layer to Bottom Layer, 1 vias

## Nets (pads, with @x,y where several pads share a name; then routed paths per layer and width w, separated by ;. In a path a pad name is that pad's centre, name@x,y a point inside that pad or via, vN(x,y) a via of type N, cw(c..) or ccw(c..) an arc to the next point about the centre after c; other vN are vias at no path point)
1V0_5: C2.2 IC1.5 IC2.3 IC2.9 IC2.28 IC2.36 IC2.40 | length 42.3
  Top Layer w0.125: IC2.3 IC2.3@13.955,13.595 ; v1@14.98,13.595 v1(14.986,13.589)
  Top Layer w0.172: v1(6.477,11.916) 6.841,11.916 7.725,12.8 IC2.36 ; v1(7,16) IC2.28 ; v1(9.779,10.414) 9.779,10.476 10,10.697 IC2.40 ; IC2.9 13.951,16.001 v1(17.145,16.002) v1(17.145,16.002) ; IC2.3@13.955,13.595 v1@14.98,13.595
  Bottom Layer w0.172: v1(6.477,11.916) 6,11.916 ; v1(7,16) 6,15 6,11.916 ; C2.2 7.239,8.367 7.001,8.129 7.001,7.127 ; IC1.5 7.488,5.05 7.001,5.537 7.001,7.127 ; v1(9.779,10.414) 9.652,10.541 9.525,10.541 ; v1(14.986,13.589) 13,13.589 ; v1(17.145,16.002) 13.075,16.002 13,15.927 13,13.589 ; 6,10.541 6,8.128 7.001,7.127 ; 6,10.541 9.525,10.541 ; 6,10.541 6,11.916 ; 9.525,10.541 9.525,12.452 10.027,12.954 12.899,12.954 13,13.055 13,13.589
3V3: C1.2 C3.2 C7.2 C8.2 FB1.1 IC1.1 IC1.3 IC2.37 LD2.2 R5.2 R8.2 R9.2 R11.2 X1.2 X1.4 X1.72 X1.74 | length 59.2
  Top Layer w0.125: IC2.37@8.785,12.065 IC2.37
  Top Layer w0.172: v1(4.597,6.553) 7.239,9.195 7.239,11.191 ; R11.2@5.556,14.624 5.556,14.679 5.359,14.875 5.359,15.051 5.69,15.382 v1(5.69,15.443) ; C3.2@6.477,11.191 7.239,11.191 ; IC2.37@8.785,12.065 8.382,12.065 7.508,11.191 7.239,11.191 ; v1(10.033,5.207) C1.2@11.034,5.207 ; R5.2 15.504,10.913 17.136,10.913 v1(17.145,10.922) ; v1(29.769,25.382) 30.607,25.382 ; R9.2 34.032,25.382 ; R8.2 37.029,25.375 35.538,25.375 35.531,25.382 34.032,25.382 ; LD2.2 38.952,21.526 38.633,21.844 38.633,23.597 38.227,24.003 30.607,24.003 30.607,25.382 ; 30.607,25.382 34.032,25.382
  Bottom Layer w0.172: v1(4.597,6.553) 5.004,6.96 5.74,6.96 IC1.3 6.512,6.95 6.604,6.858 6.604,5.207 6.447,5.05 IC1.1 ; v1(10.033,5.207) 10.033,7.112 10.287,7.366 11.938,7.366 ; C8.2 11.938,6.746 11.938,7.366 ; C7.2 13.712,6.294 13.712,7.025 13.473,7.265 FB1.1 13.397,7.366 11.938,7.366 ; v1@29.75,25.4 v1(29.769,25.382)
  Bottom Layer w0.2: X1.2 1.253,5.997 3.121,5.997 v1(3.124,5.994) ; X1.4 1.277,6.527 4.571,6.527 v1(4.597,6.553) ; X1.72 3.957,23.5 v1(4.801,22.657) ; X1.74 5.61,24 v1(5.817,24.206)
ETH_LD0: LD2.1 R15.1 | length 6.2
  Top Layer w0.125: R15.1@35.606,24.536 40.259,24.536 LD2.1
ETH_LD1: LD1.2 R10.2 | length 5.5
  Top Layer w0.125: R10.2 39.035,4.805 39.04,4.801 39.7,4.801 40.183,5.283 LD1.2
FMC_12V: X1.38 | length 0.1
  Bottom Layer w0.2: X1.38 X1.38@1.29,14.96
FMC_ADJ: C9.2 C10.2 IC2.15 IC2.21 R1.2 R2.2 R3.2 R4.2 R7.1 X1.40 X1.42 | length 22.3
  Top Layer w0.172: R7.1@5.36,11.43 v1(5.36,12.127) ; IC2.21 v1(10,19) ; IC2.15 12.41,17.96 12.41,19.497 v1(12.421,19.507)
  Bottom Layer w0.172: X1.40 1.254,15.496 3.351,15.496 3.468,15.379 3.468,13.957 v1(3.505,13.919) 4.547,12.878 C9.2 ; X1.42 3.388,16 4.293,15.096 v1(4.293,14.097) ; v1(5.36,12.127) v1@5.375,12.142 ; R4.2 R3.2 R2.2 R1.2 10.002,23.548 13.562,23.548 v1(13.564,23.546) ; C10.2 12.196,19.304 12.399,19.507 v1(12.421,19.507)
FMC_GP_D_N0: IC2.31 R7.2 X1.5 | length 12.7
  Top Layer w0.11: X1.5 1.37,6.63 2.274,6.63 2.762,7.118 4.756,9.112 4.826,9.182 4.826,10.51 ; R7.2 4.826,10.51 ; IC2.31 7.186,14.8 4.826,12.44 4.826,10.51
FMC_GP_D_N1: IC2.27 X1.37 | length 9
  Top Layer w0.11: X1.37 1.37,14.63 2.997,14.63 3.383,14.63 3.541,14.788 ccw(c3.412,14.917) 3.541,15.046 3.53,15.057 cw(c3.842,15.37) 3.53,15.683 cw(c3.842,15.37) 4.111,15.721 4.117,15.721 4.249,15.588 4.602,15.235 ccw(c4.731,15.364) 4.86,15.235 ccw(c4.731,15.364) 4.86,15.492 cw(c4.952,15.584) 4.825,15.612 cw(c5.472,15.467) 5.47,16.13 6.108,16.13 6.628,16.13 6.898,16.4 IC2.27
FMC_GP_D_N2: IC2.25 X1.43 | length 10.1
  Top Layer w0.11: X1.43 1.37,16.13 3.011,16.13 3.258,16.377 3.351,16.47 ccw(c3.067,16.755) 3.469,16.755 3.469,17.323 cw(c3.911,17.323) 3.911,17.765 cw(c3.911,17.323) 4.353,17.323 4.353,16.825 ccw(c4.535,16.825) 4.535,16.643 ccw(c4.535,16.825) 4.717,16.825 4.717,17.312 cw(c5.159,17.312) 5.159,17.754 cw(c5.16,17.312) 5.602,17.312 ccw(c5.784,17.312) 5.784,17.13 7.238,17.13 7.477,17.13 7.616,17.13 7.641,17.155 8.005,17.155 IC2.25 IC2.25@8.036,17.214
FMC_GP_D_N3: IC2.23 X1.49 | length 10.1
  Top Layer w0.11: X1.49 1.37,17.63 2.746,17.63 3.878,18.762 3.886,18.771 5.935,18.771 cw(c5.935,18.329) 6.377,18.329 6.377,18.275 ccw(c6.559,18.275) 6.559,18.093 ccw(c6.559,18.275) 6.741,18.275 6.741,18.329 cw(c7.183,18.329) 7.183,18.771 7.549,18.771 7.788,18.771 9.136,18.771 9.2,18.706 IC2.23
FMC_GP_D_N4: IC2.20 X1.55 | length 10.5
  Top Layer w0.11: X1.55 1.37,19.13 2.109,19.13 2.334,19.355 5.029,19.355 8.56,19.355 10.147,19.355 10.4,19.102 IC2.20
FMC_GP_D_N5: IC2.18 R4.1 X1.61 | length 18.6
  Top Layer w0.11: X1.61 1.342,20.658 2.709,20.658 2.829,20.538 2.853,20.538 3.016,20.538 ; 3.017,20.538 3.052,20.538 ccw(c3.052,20.72) 3.234,20.72 cw(c3.704,20.72) 4.174,20.72 4.174,20.068 ccw(c4.356,20.068) 4.538,20.068 cw(c5.009,20.068) 5.009,20.538 6.066,20.538 ; 6.067,20.538 6.206,20.538 6.528,20.538 6.556,20.509 7.284,20.509 7.293,20.519 7.438,20.519 v1(7.493,20.574) ; v1@7.47,20.629 7.675,20.629 7.765,20.719 9.137,20.719 9.175,20.681 9.268,20.588 9.306,20.55 ccw(c9.435,20.679) 9.563,20.55 10.252,21.238 cw(c10.565,20.926) 10.877,21.238 cw(c10.565,20.926) 10.877,20.613 10.344,20.08 ccw(c10.473,19.952) 10.344,19.823 10.969,19.198 11.2,18.967 IC2.18
  Bottom Layer w0.11: R4.1 6.993,22.992 6.993,21.887 7.483,21.397 7.483,20.584 v1(7.493,20.574)
FMC_GP_D_N6: IC2.16 R2.1 X1.67 | length 17.9
  Top Layer w0.11: X1.67 1.37,22.13 5.171,22.13 5.356,22.13 ccw(c5.356,22.312) 5.538,22.312 5.538,22.568 cw(c5.98,22.568) 6.422,22.568 6.422,21.66 ccw(c6.604,21.66) 6.786,21.66 6.786,21.688 cw(c7.228,21.688) 7.228,22.13 8.11,22.13 9.138,22.13 9.176,22.169 9.381,22.169 v1(9.437,22.224) 11.274,22.224 11.999,21.498 IC2.16@11.999,17.951
  Bottom Layer w0.11: R2.1 9,22.661 v1(9.437,22.224)
FMC_GP_D_N7: IC2.13 R6.2 X1.73 | length 18
  Top Layer w0.11: X1.73 1.37,23.63 11.959,23.63 ; R6.2 11.959,23.63 ; IC2.13 13.155,17.995 13.155,18.359 13.13,18.384 13.13,22.684 12.184,23.63 11.959,23.63
FMC_GP_D_P0: IC2.33 X1.3 | length 11.5
  Top Layer w0.11: X1.3 2.262,6.25 2.946,6.934 4.94,8.928 5.715,9.703 5.715,12.237 7.46,13.982 8.032,13.982 IC2.33
FMC_GP_D_P1: IC2.29 R11.1 X1.35 | length 10.2
  Top Layer w0.11: X1.35 1.37,14.37 3.257,14.37 3.49,14.37 3.725,14.605 ccw(c3.412,14.917) 3.763,15.186 3.763,15.192 3.725,15.23 3.713,15.241 cw(c3.842,15.37) 3.714,15.499 cw(c3.842,15.37) 3.971,15.498 ; 3.972,15.498 4.419,15.051 ccw(c4.731,15.364) 5.044,15.051 ccw(c4.731,15.364) 5.096,15.613 cw(c5.472,15.467) 5.47,15.87 6.133,15.87 6.628,15.87 6.749,15.749 ; R11.1 5.977,14.977 6.749,15.749 ; IC2.29 6.898,15.6 6.749,15.749
FMC_GP_D_P2: IC2.26 X1.41 | length 9.8
  Top Layer w0.11: X1.41 1.37,15.87 3.119,15.87 3.302,16.053 3.535,16.286 ccw(c3.067,16.755) 3.729,16.755 3.729,17.323 cw(c3.911,17.323) 3.911,17.505 cw(c3.911,17.323) 4.093,17.323 4.093,16.825 ccw(c4.535,16.825) 4.535,16.383 ccw(c4.535,16.825) 4.977,16.825 4.977,17.312 cw(c5.159,17.312) 5.159,17.494 cw(c5.16,17.312) 5.342,17.312 ccw(c5.784,17.312) 5.784,16.87 7.238,16.87 7.477,16.87 7.616,16.87 7.641,16.845 7.68,16.845 IC2.26@7.725,16.8
FMC_GP_D_P3: IC2.24 X1.47 | length 9.4
  Top Layer w0.11: X1.47 1.37,17.37 2.009,17.37 2.853,17.37 3.878,18.394 3.994,18.511 5.935,18.511 cw(c5.935,18.329) 6.117,18.329 6.117,18.275 ccw(c6.559,18.275) 6.559,17.833 ccw(c6.559,18.275) 7.001,18.275 7.001,18.329 cw(c7.183,18.329) 7.183,18.511 7.549,18.511 7.788,18.511 8.725,18.511 8.79,18.446 8.79,17.96 IC2.24
FMC_GP_D_P4: IC2.22 X1.53 | length 9.6
  Top Layer w0.11: X1.53 1.37,18.87 2.217,18.87 2.442,19.095 5.029,19.095 8.56,19.095 9.536,19.095 9.6,19.031 IC2.22
FMC_GP_D_P5: C11.2 IC2.19 X1.59 | length 16.9
  Top Layer w0.11: X1.59 2.853,20.25 2.897,20.25 ; 2.897,20.25 3.052,20.25 ccw(c3.052,20.72) 3.522,20.72 cw(c3.704,20.72) 3.886,20.72 3.886,20.068 ccw(c4.356,20.068) 4.827,20.068 cw(c5.009,20.068) 5.009,20.25 6.066,20.25 6.206,20.25 6.368,20.25 6.425,20.193 8.018,20.193 8.199,20.375 8.199,20.447 v1@8.255,20.447 ; v1(8.255,20.352) 8.255,20.408 v1@8.255,20.447 ; IC2.19 10.8,18.999 10.785,19.014 10.161,19.639 cw(c10.473,19.952) 10.16,20.264 10.693,20.797 ccw(c10.565,20.926) 10.693,21.055 ccw(c10.565,20.926) 10.436,21.055 9.747,20.366 cw(c9.435,20.679) 9.122,20.367 9.084,20.404 9.029,20.459 8.953,20.459 8.44,20.459 8.389,20.408 8.294,20.408 v1@8.255,20.447
  Bottom Layer w0.11: v1@8.287,20.32 v1(8.255,20.352) 9.484,20.352 C11.2
FMC_GP_D_P6: IC2.17 R3.1 X1.65 | length 18
  Top Layer w0.11: X1.65 1.37,21.87 2.009,21.87 5.171,21.87 5.356,21.87 ccw(c5.356,22.312) 5.798,22.312 5.798,22.568 cw(c5.98,22.568) 6.162,22.568 6.162,21.66 ccw(c6.604,21.66) 7.046,21.66 7.046,21.688 cw(c7.228,21.688) 7.228,21.87 8.11,21.87 8.59,21.87 8.629,21.83 8.749,21.83 v1@8.763,21.844 ; v1(8.763,21.775) v1@8.763,21.844 ; IC2.17 11.6,21.53 11.286,21.844 v1@8.763,21.844
  Bottom Layer w0.11: R3.1 7.999,22.999 7.999,22.608 8.763,21.844 v1(8.763,21.775)
FMC_GP_D_P7: IC2.14 R1.1 X1.71 | length 18.8
  Top Layer w0.11: X1.71 1.37,23.37 11.557,23.37 ; v1(11.557,22.86) 11.557,23.37 ; IC2.14 12.845,17.995 12.845,18.359 12.87,18.384 12.87,22.576 12.076,23.37 11.557,23.37
  Bottom Layer w0.11: R1.1 11.137,23 11.221,22.915 11.502,22.915 v1(11.557,22.86)
FMC_GP_S0: X1.9 | length 0
FMC_GP_S1: X1.11
FMC_GP_S2: X1.13
FMC_GP_S3: X1.15
FMC_GP_S4: X1.17 | length 0
  Top Layer w0.172: X1.17 X1.17@1.257,9.743
FMC_GP_S5: X1.19 | length 0
  Top Layer w0.172: X1.19 X1.19@1.251,10.249
FMC_GP_S6: X1.21
FMC_GP_S7: IC2.30 X1.23 | length 9.4
  Top Layer w0.125: X1.23 4.446,11.25 4.519,11.323 4.519,13.028 6.691,15.2 IC2.30
GND: C1.1 C2.1 C3.1 C4.1 C5.1 C6.1 C7.1 C8.1 C9.1 C10.1 C11.1 C12.1 C13.1 C14.1 IC1.2 IC2.12 IC2.38 IC2.47 IC2.49 J1.P10 LD1.1 R6.1 R12.1 R13.1 R14.1 X1.1 X1.7 X1.18 X1.33 X1.39 X1.45 X1.51 X1.57 X1.63 X1.69 X1.75 Y1.2 Y1.4 | length 45
  Top Layer w0.125: Y1.2@14.156,7.899 Y1.2@14.156,7.988
  Top Layer w0.172: Y1.4@12.056,9.588 13.106,9.588 13.106,7.899 Y1.2@14.156,7.899
  Top Layer w0.2: X1.7 1.325,7.325 2.165,7.325 2.46,7.62 v1(2.515,7.62) ; X1.39 2.3,15.25 v1(2.564,14.986) ; X1.45 1.257,16.757 2.558,16.757 v1(2.565,16.764) ; X1.51 1.256,18.256 2.737,18.256 v1(2.743,18.263) ; X1.57 1.257,19.743 2.736,19.743 v1(2.743,19.736) ; X1.63 1.28,21.28 2.713,21.28 v1(2.743,21.311) ; X1.69 1.284,22.716 2.709,22.716 v1(2.743,22.682) ; X1.33@1.28,13.771 2.544,13.771 v1(2.565,13.792) ; R13.1 8.001,9.728 8.026,9.703 8.738,9.703 8.941,9.5 v1(8.941,8.763) ; v1@8.382,11.024 8.738,11.024 9.2,11.486 IC2.38 ; v1@10.312,24.511 R6.1 ; C1.1@11.962,5.232 13.005,5.232 13.165,5.072 13.165,4.589 v1(13.183,4.572) ; C13.1 C14.1 ; IC2.47 12.8,11.533 12.979,11.354 v1(13.818,11.354) ; IC2.12 15.143,17.2 v1@15.596,17.653 ; v1(15.636,17.674) v1@15.636,17.728 ; J1.P10 27.154,22.455 27.154,23.557 ; C12.1 27.154,23.557 ; R12.1 27.355,23.758 27.154,23.557
  Bottom Layer w0.2: v1@2.718,21.285 v1(2.743,21.311) ; v1(2.743,9.982) 3.114,9.612 C9.1 ; v1(4.47,5.994) 5.744,5.994 IC1.2@5.775,6.025 ; C11.1 10.46,20.156 10.876,20.156 v1(10.914,20.118) ; C10.1 v1@10.898,20.09 ; v1(13.183,4.572) 14.005,4.572 14.152,4.719 15.135,5.702 ; C7.1@14.538,6.299 14.558,6.299 14.718,6.139 14.718,6.119 15.135,5.702 ; C6.1 16.104,5.344 15.493,5.344 15.135,5.702 ; C4.1@16.974,8.588 17.964,8.588 C5.1 17.951,8.601 17.951,9.43 v1(17.932,9.449)
  Bottom Layer w0.3: X1.18@1.232,9.982 v1(2.743,9.982)
  other v1: 8.941,6.045 13.081,6.477 8.371,10.994 9.423,13.437 30.632,13.919 32.461,13.919 36.601,13.919 30.632,15.951 32.461,15.951 36.601,15.951 12.548,16.561 10.302,24.506
  other v2: 11,15
I2C_SCL: X1.60
I2C_SDA: X1.58
I2S_CLK: X1.8
I2S_IN: X1.14
I2S_OUT: X1.12
I2S_WS: X1.10
MDI_0_N: IC2.2 J1.P3 J3.3 | length 29.7
  Top Layer w0.11: IC2.2 13.995,13.155 14.359,13.155 14.384,13.13 16.077,13.13 16.208,13.13 16.462,13.384 16.932,13.384 17.186,13.13 17.667,13.13 17.819,12.978 17.819,12.866 17.999,12.686 18.111,12.686 19.987,10.81 20.08,10.717 20.088,10.709 23.659,10.709 23.724,10.773 23.724,11.491 23.659,11.555 J1.P3@23.116,11.555 ; J3.3 19.93,5.461 19.866,5.525 19.866,7.255 20.453,7.843 20.853,7.843 25.407,7.843 25.508,7.843 27.462,9.796 27.462,10.103 25.662,11.903 24.41,11.903 24.27,11.763 22.908,11.763 J1.P3
MDI_0_P: IC2.1 J1.P2 J3.4 | length 29.4
  Top Layer w0.11: IC2.1 13.995,12.845 14.359,12.845 14.384,12.87 16.077,12.87 16.316,12.87 16.57,13.124 16.824,13.124 17.078,12.87 17.559,12.87 17.559,12.758 17.891,12.426 18.003,12.426 19.803,10.626 19.896,10.533 19.98,10.449 25.308,10.449 J1.P2 24.454,11.487 24.454,11.579 24.518,11.643 25.554,11.643 27.202,9.995 27.202,9.904 25.407,8.109 25.4,8.103 20.853,8.103 20.345,8.103 19.606,7.363 19.606,5.525 19.541,5.461 J3.4
MDI_1_N: IC2.5 J1.P5 J3.1 | length 29.3
  Top Layer w0.11: IC2.5 13.995,14.355 14.359,14.355 14.384,14.33 15.708,14.33 15.893,14.33 ccw(c15.893,14.512) 16.075,14.512 16.075,14.579 cw(c16.517,14.579) 16.959,14.579 16.959,14.512 ccw(c17.141,14.512) 17.141,14.33 18.171,14.33 18.442,14.33 19.358,13.414 23.761,13.414 23.825,13.478 23.825,13.995 23.683,14.138 J1.P5@23.073,14.138 ; J1.P5 22.908,14.303 24.27,14.303 24.42,14.453 27.755,14.453 27.971,14.236 27.971,13.864 27.971,12.785 cw(c27.529,12.785) 27.529,12.343 ccw(c27.529,12.161) 27.529,11.979 28.154,11.979 cw(c28.154,11.536) 28.154,11.094 ccw(c28.153,10.912) 27.971,10.912 27.971,10.103 27.971,9.468 25.711,7.208 25.711,5.836 J3.1
MDI_1_P: IC2.4 J1.P4 J3.2 | length 29.6
  Top Layer w0.11: IC2.4 13.995,14.045 14.359,14.045 14.384,14.07 15.708,14.07 15.893,14.07 ccw(c15.893,14.512) 16.335,14.512 16.335,14.579 cw(c16.517,14.579) 16.699,14.579 16.699,14.512 ccw(c17.141,14.512) 17.141,14.07 18.171,14.07 18.334,14.07 19.323,13.081 J1.P4 24.454,14.027 24.454,14.119 24.527,14.193 27.647,14.193 27.711,14.128 27.711,13.864 27.711,12.785 cw(c27.529,12.785) 27.529,12.603 ccw(c27.529,12.161) 27.529,11.718 28.154,11.718 cw(c28.154,11.536) 28.154,11.354 ccw(c28.153,10.912) 27.711,10.912 27.711,10.103 27.711,9.576 23.597,5.461 J3.2
MDI_2_N: IC2.8 J1.P7 J2.2 | length 29.2
  Top Layer w0.11: IC2.8 13.995,15.555 14.359,15.555 14.384,15.53 16.599,15.53 18.032,15.53 ccw(c18.032,15.712) 18.215,15.712 18.215,15.916 cw(c18.657,15.916) 19.099,15.916 19.099,15.712 ccw(c19.281,15.712) 19.281,15.53 21.793,15.53 23.506,15.53 23.774,15.799 23.774,16.434 23.573,16.635 J1.P7@23.116,16.635 ; J2.2 21.7,24.486 21.765,24.421 21.765,23.043 22.184,22.625 23.972,20.837 23.972,20.453 25.044,19.38 25.304,19.38 26.622,19.38 27.311,19.38 27.375,19.316 27.375,17.165 27.311,17.1 26.622,17.1 24.527,17.1 24.27,16.843 22.908,16.843 J1.P7
MDI_2_P: IC2.7 J1.P6 J2.1 | length 29.7
  Top Layer w0.11: IC2.7 13.995,15.245 14.359,15.245 14.384,15.27 16.599,15.27 18.032,15.27 ccw(c18.032,15.712) 18.475,15.712 18.475,15.916 cw(c18.657,15.916) 18.839,15.916 18.839,15.712 ccw(c19.281,15.712) 19.281,15.27 21.793,15.27 23.613,15.27 24.013,15.669 25.098,15.669 J1.P6@25.273,15.494 ; J2.1 22.089,24.486 22.025,24.421 22.025,23.151 22.368,22.808 24.232,20.944 24.232,20.56 25.152,19.64 25.304,19.64 27.418,19.64 27.635,19.423 27.635,17.057 27.418,16.84 24.635,16.84 24.454,16.659 24.454,16.567 J1.P6
MDI_3_N: IC2.11 J1.P9 J2.4 | length 29.1
  Top Layer w0.11: IC2.11 17.108,16.8 17.487,16.8 ccw(c17.4,17.193) 17.789,17.088 cw(c18.149,17.345) 17.836,17.658 cw(c18.149,17.345) 18.461,17.658 18.557,17.561 18.627,17.491 ccw(c18.756,17.62) 18.884,17.492 19.422,18.029 19.571,18.029 23.761,18.029 23.825,18.094 23.825,18.466 J1.P9@23.114,19.177 ; J2.4 16.62,24.486 16.685,24.421 16.685,23.638 16.913,23.41 17.485,22.838 cw(c17.356,22.709) 17.485,22.581 17.118,22.213 ccw(c17.43,21.901) 17.117,21.589 ; 17.118,21.588 ccw(c17.43,21.901) 17.743,21.588 19.005,22.851 cw(c19.134,22.722) 19.263,22.851 cw(c19.134,22.722) 19.263,22.593 18.809,22.139 ccw(c19.122,21.827) 18.809,21.514 19.774,20.549 20.45,20.549 20.636,20.549 22.998,20.549 24.152,19.395 24.152,19.241 24.088,19.177 J1.P9@23.114,19.177 ; J1.P9 J1.P9@23.114,19.177
MDI_3_P: IC2.10 J1.P8 J2.3 | length 29.6
  Top Layer w0.11: IC2.10 13.995,16.445 14.359,16.445 14.454,16.54 17.368,16.54 17.5,16.54 ccw(c17.5,16.67) 17.524,16.542 ccw(c17.4,17.193) 18.057,17.108 ccw(c17.928,17.124) 18.02,17.216 cw(c18.149,17.345) 18.02,17.474 cw(c18.149,17.345) 18.277,17.474 18.442,17.309 ccw(c18.756,17.62) 19.068,17.308 19.53,17.769 19.688,17.769 24.025,17.769 24.417,18.161 J1.P8@25.357,18.161 ; J2.3 17.009,24.486 16.945,24.421 16.945,23.746 17.097,23.594 17.669,23.022 cw(c17.356,22.709) 17.669,22.397 17.302,22.029 ccw(c17.43,21.901) 17.558,21.771 18.821,23.034 cw(c19.134,22.722) 19.447,23.034 cw(c19.134,22.722) 19.447,22.409 18.993,21.955 ccw(c19.122,21.827) 18.993,21.698 19.882,20.809 20.45,20.809 20.896,20.809 23.106,20.809 24.412,19.503 24.412,19.149 25.357,18.204 J1.P8@25.357,18.161 ; J1.P8 J1.P8@25.357,18.161
nALERT: X1.62
NetC4_2: C4.2 C5.2 C6.2 FB1.2 IC2.6 IC2.41 | length 24.2
  Top Layer w0.125: IC2.41 10.407,12.043 10.407,10.675 v1(10.414,10.668) ; IC2.6 15.48,14.8 v1(15.494,14.814)
  Bottom Layer w0.125: v1(10.414,10.668) 10.414,10.233 10.487,10.16 13.589,10.16 15.977,7.772 16.129,7.772 ; FB1.2 15.951,7.29 16.129,7.112 C6.2 16.195,6.553 17.323,6.553 17.983,7.214 C5.2 ; v1(15.494,14.814) 16.056,14.814 16.129,14.741 16.129,7.772 ; C5.2@17.983,7.814 C4.2 16.967,7.772 16.129,7.772
NetC12_2: C12.2 J1.MH1 J1.MH2 R12.2 | length 20.1
  Top Layer w0.125: C12.2 26.969,24.957 R12.2 27.743,24.111 27.743,24.023 28.7,23.066 28.7,22.726 28.7,22.152 29.337,21.515 29.337,8.447 28.7,7.81 J1.MH1@28.7,7.236
NetC13_2: C13.2 IC2.42 Y1.1 | length 7.3
  Top Layer w0.125: IC2.42 10.8,8.001 ; C13.2 10.8,6.477 10.8,8.001 ; Y1.1 11.993,8.001 10.8,8.001
NetC14_2: C14.2 IC2.43 Y1.3 | length 10.5
  Top Layer w0.125: IC2.43 11.176,12.026 11.176,10.995 11.249,10.922 14.131,10.922 Y1.3 15.494,9.563 15.494,6.477 C14.2
NetIC2_32: IC2.32 R9.1 | length 33.1
  Top Layer w0.125: v1(6.731,13.843) 7.288,14.4 IC2.32 ; v1@32.053,24.968 v1(31.979,24.968) 32.004,24.994 33.456,24.994 R9.1
  Bottom Layer w0.125: v1(6.731,13.843) 11.557,18.669 13.284,18.669 17.497,22.882 24.838,22.882 26.924,24.968 v1(31.979,24.968) v1@31.928,24.917
NetIC2_34: IC2.34 R8.1 R15.2 | length 38
  Top Layer w0.125: v1(6.477,12.446) 6.477,12.691 7.386,13.6 IC2.34 ; v1(32.461,24.562) 35.006,24.562 R15.2 35.056,24.994 R8.1
  Bottom Layer w0.125: v1(6.477,12.446) 6.477,12.954 11.811,18.288 13.484,18.288 17.853,22.657 25.044,22.657 26.949,24.562 v1(32.461,24.562)
NetIC2_35: IC2.35 R10.1 R14.2 | length 53.3
  Top Layer w0.125: v1(6.992,12.693) 6.992,12.707 7.448,13.163 8.013,13.163 IC2.35 ; v1(34.798,6.477) 34.798,5.786 35.179,5.405 R14.2 R10.1
  Bottom Layer w0.125: v1(6.992,12.693) 12.206,17.907 13.789,17.907 18.234,22.352 25.146,22.352 27.051,24.257 31.398,24.257 31.652,24.003 34.544,24.003 34.798,23.749 v1(34.798,6.477)
NetIC2_39: IC2.39 R13.2 | length 2.8
  Top Layer w0.125: R13.2 8.657,10.308 9.563,11.214 9.563,12.013 IC2.39
NetJ1_P1: J1.P1 R5.1 | length 8.4
  Top Layer w0.125: R5.1 17.253,11.703 19.685,9.271 J1.P1
nLED1: X1.6
nLED2: X1.16
UART_RX: X1.32
UART_TX: X1.22
pads on no net: IC1.4 IC2.44 IC2.45 IC2.46 IC2.48 J1.MH3 J1.MH4 J1.P11 J1.P12 J1.P13 J1.P14 X1.20 X1.34 X1.36 X1.44 X1.46 X1.48 X1.50 X1.52 X1.54 X1.56 X1.64 X1.66 X1.68 X1.70

## Polygon pours and split planes (outlines as drawn)
GND on Bottom Layer "NONET_L-01_P-001" (solid, pour order 0): 0,26 0,4 42,4 42,26
GND on Top Layer "NONET_L-01_P-001" (solid, pour order 1): 0,26 0,4 42,4 42,26
3V3 on Int2 (PWR) (split plane): 41.49,16.839 41.445,16.828 41.269,16.765 41.099,16.685 40.939,16.588 40.788,16.477 40.649,16.351 40.523,16.212 40.412,16.061 40.315,15.901 40.235,15.731 40.172,15.555 40.126,15.373 40.099,15.187 40.09,15.003 40.09,15 40.09,14.997 40.099,14.813 40.126,14.627 40.172,14.445 40.235,14.269 40.315,14.099 40.412,13.939 40.523,13.788 40.649,13.649 40.788,13.523 40.939,13.412 41.099,13.315 41.269,13.235 41.445,13.172 41.49,13.161 41.49,4.51 4.51,4.51 4.51,4.575 4.51,4.584 4.502,4.707 4.476,4.836 4.433,4.962 4.375,5.08 4.301,5.19 4.214,5.289 4.115,5.376 4.005,5.45 3.887,5.508 3.761,5.551 3.632,5.577 3.509,5.585 3.5,5.585 0.51,5.585 0.51,11.265 2.9,11.265 2.902,11.265 3.045,11.274 3.187,11.302 3.325,11.349 3.455,11.413 3.576,11.494 3.685,11.59 3.781,11.699 3.862,11.82 3.926,11.95 3.973,12.088 4.001,12.23 4.01,12.373 4.01,12.375 4.01,12.377 4.001,12.52 3.973,12.662 3.926,12.8 3.862,12.93 3.781,13.051 3.685,13.16 3.576,13.256 3.455,13.337 3.325,13.401 3.187,13.448 3.045,13.476 2.902,13.485 2.9,13.485 0.51,13.485 0.51,24.415 3.5,24.415 3.509,24.415 3.632,24.423 3.761,24.449 3.887,24.492 4.005,24.55 4.115,24.624 4.214,24.711 4.301,24.81 4.375,24.92 4.433,25.038 4.476,25.164 4.502,25.293 4.51,25.416 4.51,25.425 4.51,25.477 41.49,25.477
FMC_ADJ on Int2 (PWR) (split plane): 17.498,19.789 11.719,14.011 8.04,10.331 6.957,9.248 5.616,9.248 4.905,9.96 4.905,12.268 4.895,12.318 4.867,12.36 3.495,13.731 3.453,13.759 3.404,13.769 3.254,13.769 3.254,14.17 3.368,14.285 3.566,14.483 4.765,14.483 4.825,14.423 4.825,14.119 4.835,14.07 4.863,14.028 5.256,13.635 5.298,13.607 5.348,13.597 5.397,13.607 5.439,13.635 6.467,14.663 6.495,14.705 6.505,14.754 6.505,16.193 6.594,16.282 6.622,16.324 6.632,16.374 6.632,19.149 9.322,19.149 9.371,19.159 9.413,19.187 11.204,20.978 11.963,20.978 12.013,20.988 12.055,21.016 12.842,21.803 12.87,21.845 12.88,21.895 12.88,23.216 12.88,24.026 17.498,24.026
GND on Int1 (GND) (split plane): 41.49,16.839 41.445,16.828 41.269,16.765 41.099,16.685 40.939,16.588 40.788,16.477 40.649,16.351 40.523,16.212 40.412,16.061 40.315,15.901 40.235,15.731 40.172,15.555 40.126,15.373 40.099,15.187 40.09,15.003 40.09,15 40.09,14.997 40.099,14.813 40.126,14.627 40.172,14.445 40.235,14.269 40.315,14.099 40.412,13.939 40.523,13.788 40.649,13.649 40.788,13.523 40.939,13.412 41.099,13.315 41.269,13.235 41.445,13.172 41.49,13.161 41.49,4.51 4.51,4.51 4.51,4.575 4.51,4.584 4.502,4.707 4.476,4.836 4.433,4.962 4.375,5.08 4.301,5.19 4.214,5.289 4.115,5.376 4.005,5.45 3.887,5.508 3.761,5.551 3.632,5.577 3.509,5.585 3.5,5.585 0.51,5.585 0.51,11.265 2.9,11.265 2.902,11.265 3.045,11.274 3.187,11.302 3.325,11.349 3.455,11.413 3.576,11.494 3.685,11.59 3.781,11.699 3.862,11.82 3.926,11.95 3.973,12.088 4.001,12.23 4.01,12.373 4.01,12.375 4.01,12.377 4.001,12.52 3.973,12.662 3.926,12.8 3.862,12.93 3.781,13.051 3.685,13.16 3.576,13.256 3.455,13.337 3.325,13.401 3.187,13.448 3.045,13.476 2.902,13.485 2.9,13.485 0.51,13.485 0.51,24.415 3.5,24.415 3.509,24.415 3.632,24.423 3.761,24.449 3.887,24.492 4.005,24.55 4.115,24.624 4.214,24.711 4.301,24.81 4.375,24.92 4.433,25.038 4.476,25.164 4.502,25.293 4.51,25.416 4.51,25.425 4.51,25.477 41.49,25.477

## Other copper
Top Layer:
  region net GND: 41.611,12.024 cw(c41.821,15.017) 41.611,18.009 41.611,16.653 ccw(c41.821,15.017) 41.611,13.38
  pour cut-out: 2.254,13.321 0.321,13.321 0,13 0,12.992 2.256,12.992
Bottom Layer:
  region net GND: 40.821,12.017 cw(c40.821,15.017) 40.821,18.017 41.611,18.017 41.611,16.653 ccw(c41.821,15.017) 41.611,13.38 41.611,12.017
  pour cut-out: 2.254,25 2.254,4 0,4 0,25
  text "bot" at 41.15,24.25 h0.5 r90
  text "4" at 41.25,22.75 h0.5 r90
Int1 (GND) (plane layer: these items are gaps in the copper):
  text "2" at 41.25,21.05 h0.5 r90
Int2 (PWR) (plane layer: these items are gaps in the copper):